# Altium PCB contrl.PcbDoc
Units mil, origin at the board's own origin, x right, y up, seen from the top; angles counter-clockwise.
Board outline 2165.35 x 984.25 mil, 2 copper layers (Top Layer, Bottom Layer); 3 components, 21 nets, 56 pads, 27 vias.
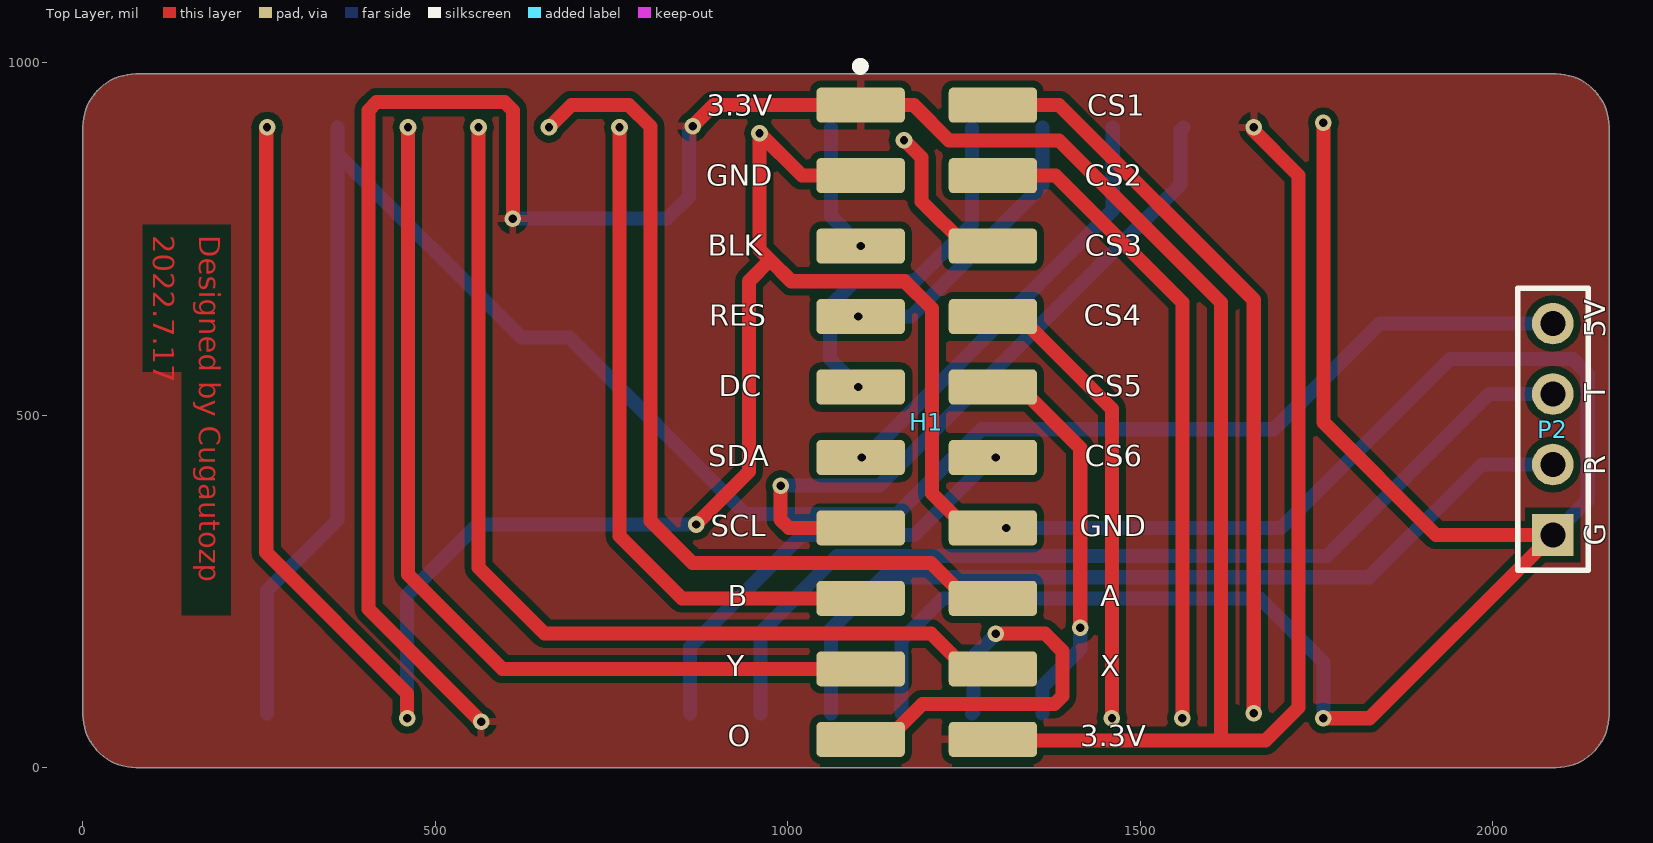
[diagram p0: Top Layer view]
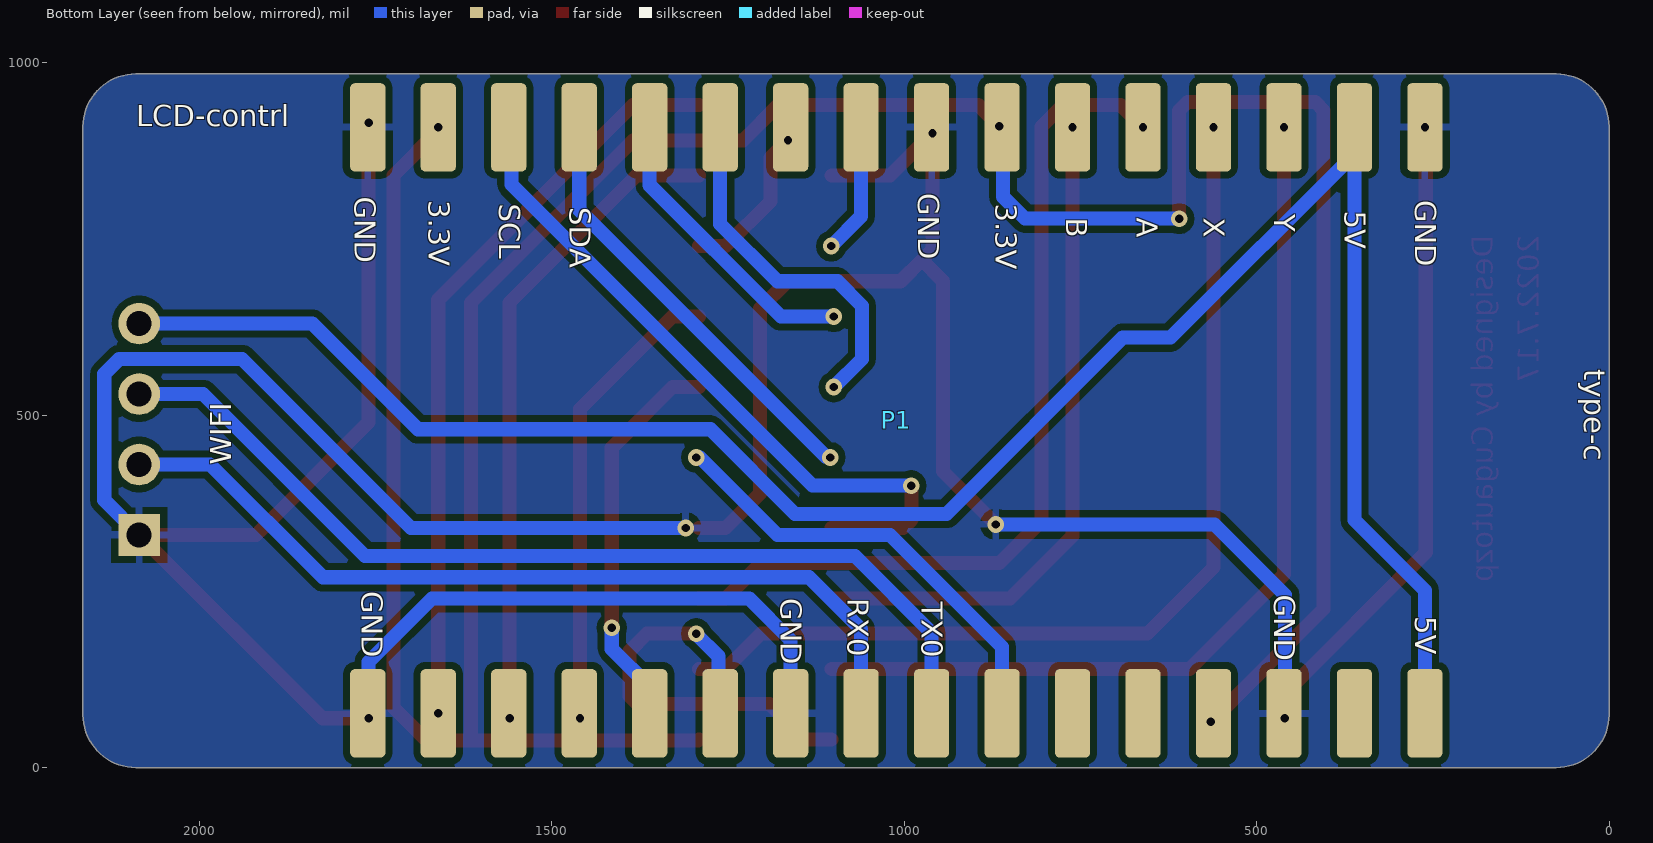
[diagram p1: Bottom Layer view, seen from below]

## Layer stack, top to bottom
Top Solder: solder mask 0.4, Solder Resist, Dk 3.5
Top Layer: signal copper 1.4
Dielectric 1: dielectric 12.6, FR-4, Dk 4.8
Bottom Layer: signal copper 1.4
Bottom Solder: solder mask 0.4, Solder Resist, Dk 3.5

## Board outline
0,75 0,909.25 cw(c75,909.25) 75,984.25 2090.35,984.25 cw(c2090.35,909.25) 2165.35,909.25 2165.35,75 cw(c2090.35,75) 2090.35,0 75,0 cw(c75,75)

## Design rules (kind name [scope] priority, off if disabled: settings)
Clearance [All] p1: gap=10 ignorepadtopadclearanceinfootprint=FALSE except(0: Arc-Hole Track-Hole SMDPad-Hole THPad-Hole Via-Hole Fill-Hole Poly-Hole Region-Hole Text-Hole)
PolygonConnect [All] p1: connectstyle=Relief reliefconductorwidth=10 reliefentries=4 polygonreliefangle="90 Angle" airgapwidth=10
RoutingVias [All] p1: holewidth=28 width=50 viastyle="Through Hole" minholewidth=28 minwidth=50 maxholewidth=28 maxwidth=50
SolderMaskExpansion [All] p1: expansion=4 istentingtop=FALSE
Width [All] p1: maxlimit=60 minlimit=10 preferedwidth=10
30 further rules are at their usual default settings.

## Components (designator, comment, footprint, x,y, rotation, side; value= is the part's Value field where it differs from the comment)
H1 "双排2*10" 20pin 1194.02,490 r270 top
P1 "Header 16X2A" 合宙esp32-c3开发板底座 1761.22,77.49 r180 bottom locked
P2 "Header 4" HDR1X4 2085.63,330 r90 top

## Footprints (in the part's own frame and the unit in brackets; to place one, negate y for a bottom-side part, rotate by r counter-clockwise, add the part's x,y. Pads: shape width x height; smd on the part's side, far side on the other; paste and mask are expansions set on the pad)
20pin [mil]
  rrect25% 50x125.2 smd mask+0: 1(-450,-90.49) 2(-450,97.01) 3(-350,-90.49) 4(-350,97.01) 5(-250,-90.49) 6(-250,97.01) 7(-150,-90.49) 8(-150,97.01) 9(-50,-90.49) 10(-50,97.01) 11(50,-90.49) 12(50,97.01) 13(150,-90.49) 14(150,97.01) 15(250,-90.49) 16(250,97.01) 17(350,-90.49) 18(350,97.01) 19(450,-90.49) 20(450,97.01)
  silkscreen extent -511,-97 -499,-85
HDR1X4 [mm] "Connector; Header; 4 Position"
  rect 1.5x1.5 hole 0.9: 1(0,0)
  round 1.5 hole 0.9: 2(2.54,0) 3(5.08,0) 4(7.62,0)
  silkscreen extent -1.27,-1.27 8.89,1.27
合宙esp32-c3开发板底座 [mil]
  rrect25% 50x125.2 smd mask+0: 1(0,-0.49) 2(100,-0.49) 3(200,-0.49) 4(300,-0.49) 5(400,-0.49) 6(500,-0.49) 7(600,-0.49) 8(700,-0.49) 9(800,-0.49) 10(900,-0.49) 11(1000,-0.49) 12(1100,-0.49) 13(1200,-0.49) 14(1300,-0.49) 15(1400,-0.49) 16(1500,-0.49) 17(0,830.93) 18(100,830.93) 19(200,830.93) 20(300,830.93) 21(400,830.93) 22(500,830.93) 23(600,830.93) 24(700,830.93) 25(800,830.93) 26(900,830.93) 27(1000,830.93) 28(1100,830.93) 29(1200,830.93) 30(1300,830.93) 31(1400,830.93) 32(1500,830.93)

## Part data
P1: "Header, 16-Pin, Dual row", LatestRevisionDate=17-Jul-2002, LatestRevisionNote="Re-released for DXP Platform.", Publisher="Altium Limited"
P2: "Header, 4-Pin", LatestRevisionDate=17-Jul-2002, LatestRevisionNote="Re-released for DXP Platform.", Publisher="Altium Limited"

## Via types
v1: diameter 23.62, hole 11.81, Top Layer to Bottom Layer, tented both sides, 27 vias

## Nets (pads, with @x,y where several pads share a name; then routed paths per layer and width w, separated by ;. In a path a pad name is that pad's centre, name@x,y a point inside that pad or via, vN(x,y) a via of type N, cw(c..) or ccw(c..) an arc to the next point about the centre after c; other vN are vias at no path point)
5V: P1.16 P1.31 P2.4 | length 2920.7
  Bottom Layer w20: P1.16 261.22,251.22 361.22,351.22 P1.31@361.22,870.82 ; P1.31 P1.31@361.22,870.82 ; P2.4 1840,630 1690,480 1275,480 1155,360 940,360 690,610 622.04,610 P1.31@361.22,870.82
BLK: H1.5 P1.24 | length 185.9
  Bottom Layer w20: P1.24 1061.22,782.31 v1(1103.53,740)
CS1: H1.2 P1.2 | length 1071.4
  Top Layer w20: H1.2 1385,940 1661.22,663.78 v1(1661.22,77)
CS2: H1.4 P1.3 | length 933.5
  Top Layer w20: H1.4 1380,840 1560,660 v1(1560,70)
CS3: H1.6 P1.23 | length 224.7
  Top Layer w20: v1(1165,890) 1165.75,890 1190,865.75 1190,803.43 1253.43,740 H1.6
CS4: H1.8 P1.4 | length 662
  Top Layer w20: H1.8 1328.63,640 1460,508.63 v1(1460,70)
CS5: H1.10 P1.5 | length 558.7
  Top Layer w20: H1.10 1328.63,540 1415,453.63 v1(1415,198.19)
  Bottom Layer w20: P1.5 1361.22,114.6 1415,168.38 v1(1415,198.19)
CS6: H1.12 P1.10 | length 639.3
  Bottom Layer w20: P1.10 861.22,171.22 1020,330 1180,330 1290,440 v1(1295,440)
DC: H1.9 P1.22 | length 518.1
  Bottom Layer w20: v1(1100,540) 1060,580 1060,655 1095,690 1180,690 1261.22,771.22 P1.22
GND: H1.3 H1.14 P1.1 P1.7 P1.14 P1.17 P1.25 P1.32 P2.1 | length 6225.2
  Top Layer w20: v1(261.22,908.42) 260.53,907.72 260.53,905.16 260,904.64 260,305 460,105 v1(460,70) ; v1(870,345) 945,420 945,690 975,720 ; H1.3 1020,840 v1(960,900) 960,735 975,720 ; H1.14 1253.43,340 1204.59,388.84 1204.59,651.16 1165.75,690 1005,690 975,720 ; v1(1760,70) 1825.63,70 P2.1 1920,330 1760,490 v1(1760,915)
  Bottom Layer w20: v1(460,70) 460,245 560,345 v1(870,345) ; P1.7 1161.22,181.22 1220,240 1670,240 1760,150 v1(1760,70) ; v1(1310,340) 1700,340 1939.53,579.53 2113.91,579.53 2135.16,558.28 2135.16,379.53 P2.1
KEY1: H1.16 P1.28 | length 1260.8
  Top Layer w20: v1(661.22,908.42) 693.03,940.23 774.4,940.23 805,909.63 805,350 865,290 1203.43,290 1253.43,240 H1.16
KEY2: H1.15 P1.27 | length 958.7
  Top Layer w20: v1(761.22,908.42) 761.22,328.78 850,240 H1.15
KEY3: H1.18 P1.29 | length 1414
  Top Layer w20: v1(561.22,908.42) 561.22,283.78 655,190 1203.43,190 1253.43,140 H1.18
KEY4: H1.17 P1.30 | length 1332.4
  Top Layer w20: v1(461.22,908.42) 461.22,273.78 595,140 H1.17
KEY5: H1.19 P1.6 | length 607.7
  Top Layer w20: H1.19 1141.13,40 1191.13,90 1378.28,90 1390,101.72 1390,165 1365,190 v1(1295,190)
  Bottom Layer w20: P1.6 1263.86,79.64 1263.86,157.88 1295,189.02 v1(1295,190)
RES: H1.7 P1.21 | length 420.6
  Bottom Layer w20: v1(1100,640) 1175,640 1361.22,826.22 P1.21
RX0: P1.8 P2.2 | length 1240.5
  Bottom Layer w20: P1.8 1061.22,196.22 1135,270 1825,270 1985,430 P2.2
SCL: H1.13 P1.19 | length 993.7
  Top Layer w20: v1(990,400) 990,351.72 1001.72,340 H1.13
  Bottom Layer w20: v1(990,400) 1130,400 1557.53,827.53 1557.53,904.73 P1.19
SDA: H1.11 P1.20 | length 618.9
  Bottom Layer w20: v1(1105,440) 1105.69,440.69 1110.69,440.69 1461.22,791.22 P1.20
TX0: P1.9 P2.3 | length 1379
  Bottom Layer w20: P1.9 961.22,191.22 1070,300 1765,300 1995,530 P2.3
VCC3.3: H1.1 H1.20 P1.13 P1.18 P1.26 | length 4468.2
  Top Layer w20: v1(565,65) 405,225 405,932.43 416.72,944.14 598.28,944.14 610,932.43 v1(610,778.84) ; v1(865,910) 895,940 H1.1 1178.8,940 1228.8,890 1385,890 1615,660 1615,38.19 ; H1.20 1292.84,38.19 1615,38.19 ; v1@1660,905 1725,840 1725,85 1678.19,38.19 1615,38.19
  Bottom Layer w20: v1(610,778.84) 828.84,778.84 860,810 860,905 v1(865,910)
  other v1: 1661.22,908.42
pads on no net: P1.11 P1.12 P1.15

## Polygon pours and split planes (outlines as drawn)
VCC3.3 on Top Layer "VCC" (solid, pour order 1): 0,75 0,909.25 cw(c75,909.25) 75,984.25 2090.35,984.25 cw(c2090.35,909.25) 2165.35,909.25 2165.35,75 cw(c2090.35,75) 2090.35,0 75,0 cw(c75,75)
GND on Bottom Layer "GND" (solid, pour order 2): 0,75 0,909.25 cw(c75,909.25) 75,984.25 2090.35,984.25 cw(c2090.35,909.25) 2165.35,909.25 2165.35,75 cw(c2090.35,75) 2090.35,0 75,0 cw(c75,75)

## Other copper
Top Layer:
  text "2022.7.17" at 100,755 h30 r270
  text "Designed by Cugautozp" at 165,755 h30 r270

## Silkscreen, mask and mechanical layers (free items; w line width, h text height)
Top Overlay:
  text "3.3V" at 885,925 h30
  text "CS1" at 1425,925 h30
  text "GND" at 884.43,825.56 h30
  text "CS2" at 1421.43,825.56 h30
  text "BLK" at 886.21,726.11 h30
  text "CS3" at 1421.43,726.11 h30
  text "RES" at 888.5,626.67 h30
  text "CS4" at 1420,626.67 h30
  text "5V" at 2160,610 h30 r90
  text "DC" at 901.92,527.22 h30
  text "CS5" at 1421.43,527.22 h30
  text "T" at 2160,520 h30 r90
  text "SDA" at 887.57,427.78 h30
  text "CS6" at 1421.43,427.78 h30
  text "R" at 2160,415 h30 r90
  text "SCL" at 891,328.33 h30
  text "GND" at 1414.15,328.33 h30
  text "G" at 2160,315 h30 r90
  text "B" at 914.64,228.89 h30
  text "A" at 1443.64,228.89 h30
  text "Y" at 913.21,129.44 h30
  text "X" at 1443.64,129.44 h30
  text "O" at 915,30 h30
  text "3.3V" at 1414.72,30 h30
Bottom Overlay:
  text "LCD-contrl" at 2090,910 h30
  text "GND" at 980,815 h30 r90
  text "GND" at 1780,810 h30 r90
  text "GND" at 275,805 h30 r90
  text "3.3V" at 1675,805 h30 r90
  text "3.3V" at 870,800 h30 r90
  text "SCL" at 1575,800 h30 r90
  text "SDA" at 1475,795 h30 r90
  text "5V" at 375,790 h30 r90
  text "Y" at 475,785 h30 r90
  text "X" at 575,780 h30 r90
  text "A" at 670,780 h30 r90
  text "B" at 770,780 h30 r90
  text "type-c" at 35,565 h30 r90
  text "WIFI" at 1955,430 h30 r270
  text "GND" at 1770,250 h30 r90
  text "GND" at 475,245 h30 r90
  text "RX0" at 1080,240 h30 r90
  text "GND" at 1175,240 h30 r90
  text "TX0" at 975,235 h30 r90
  text "5V" at 275,215 h30 r90
Top Solder:
  text "2022.7.17" at 100,755 h30 r270
  text "Designed by Cugautozp" at 165,755 h30 r270
Mechanical 1:
  the board outline again, w10